# Altium PCB KNoT_Thing_Starter_Board.PcbDoc
Units mm, origin at the board's own origin, x right, y up, seen from the top; angles counter-clockwise.
Board outline 45.72 x 48.26 mm, 2 copper layers (Top Layer, Bottom Layer); 19 components, 30 nets, 133 pads, 10 vias.
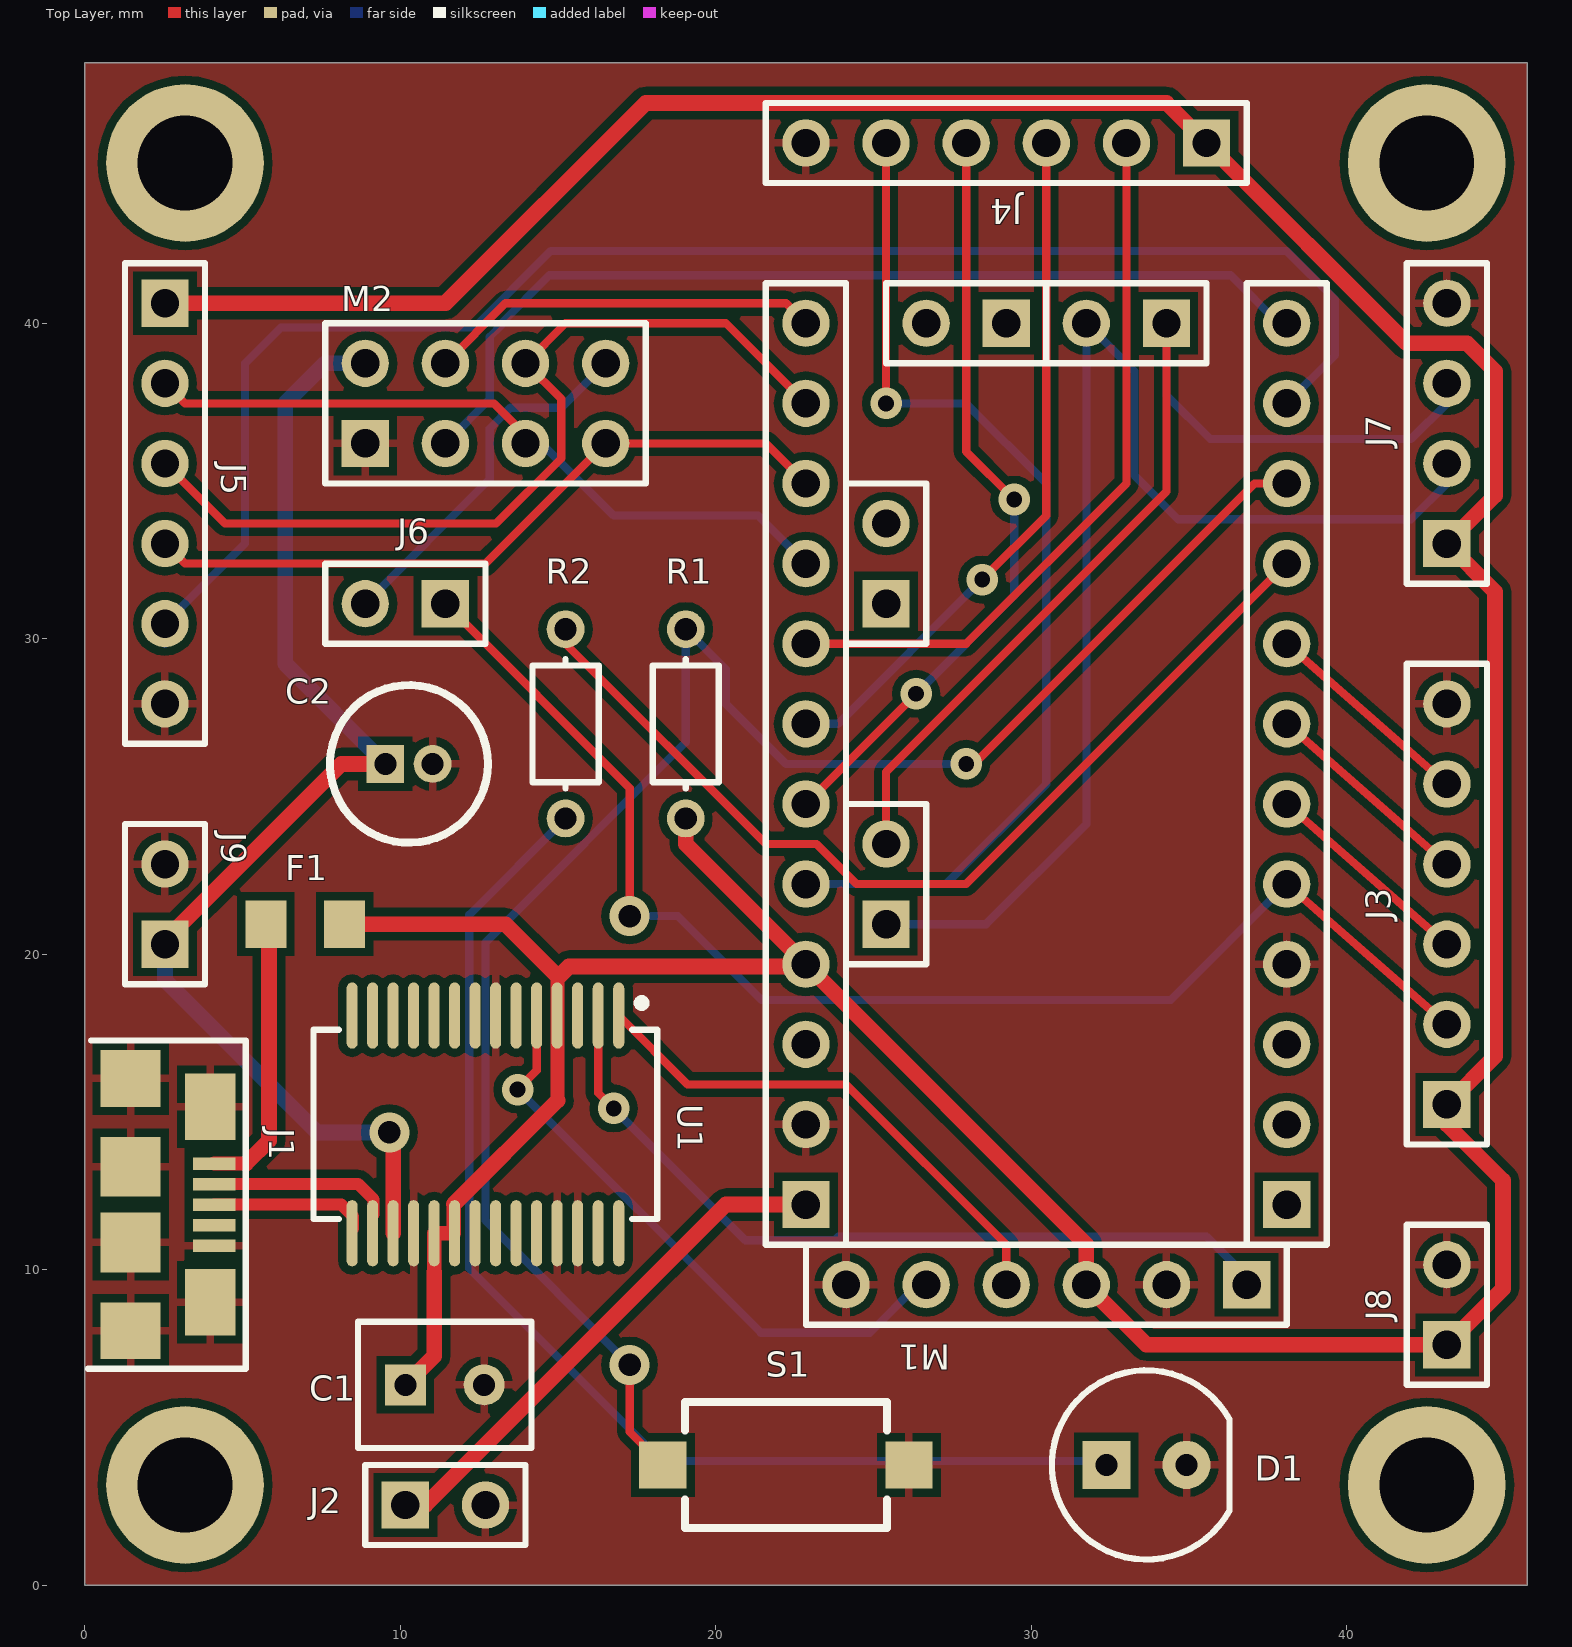
[diagram p0: Top Layer view]
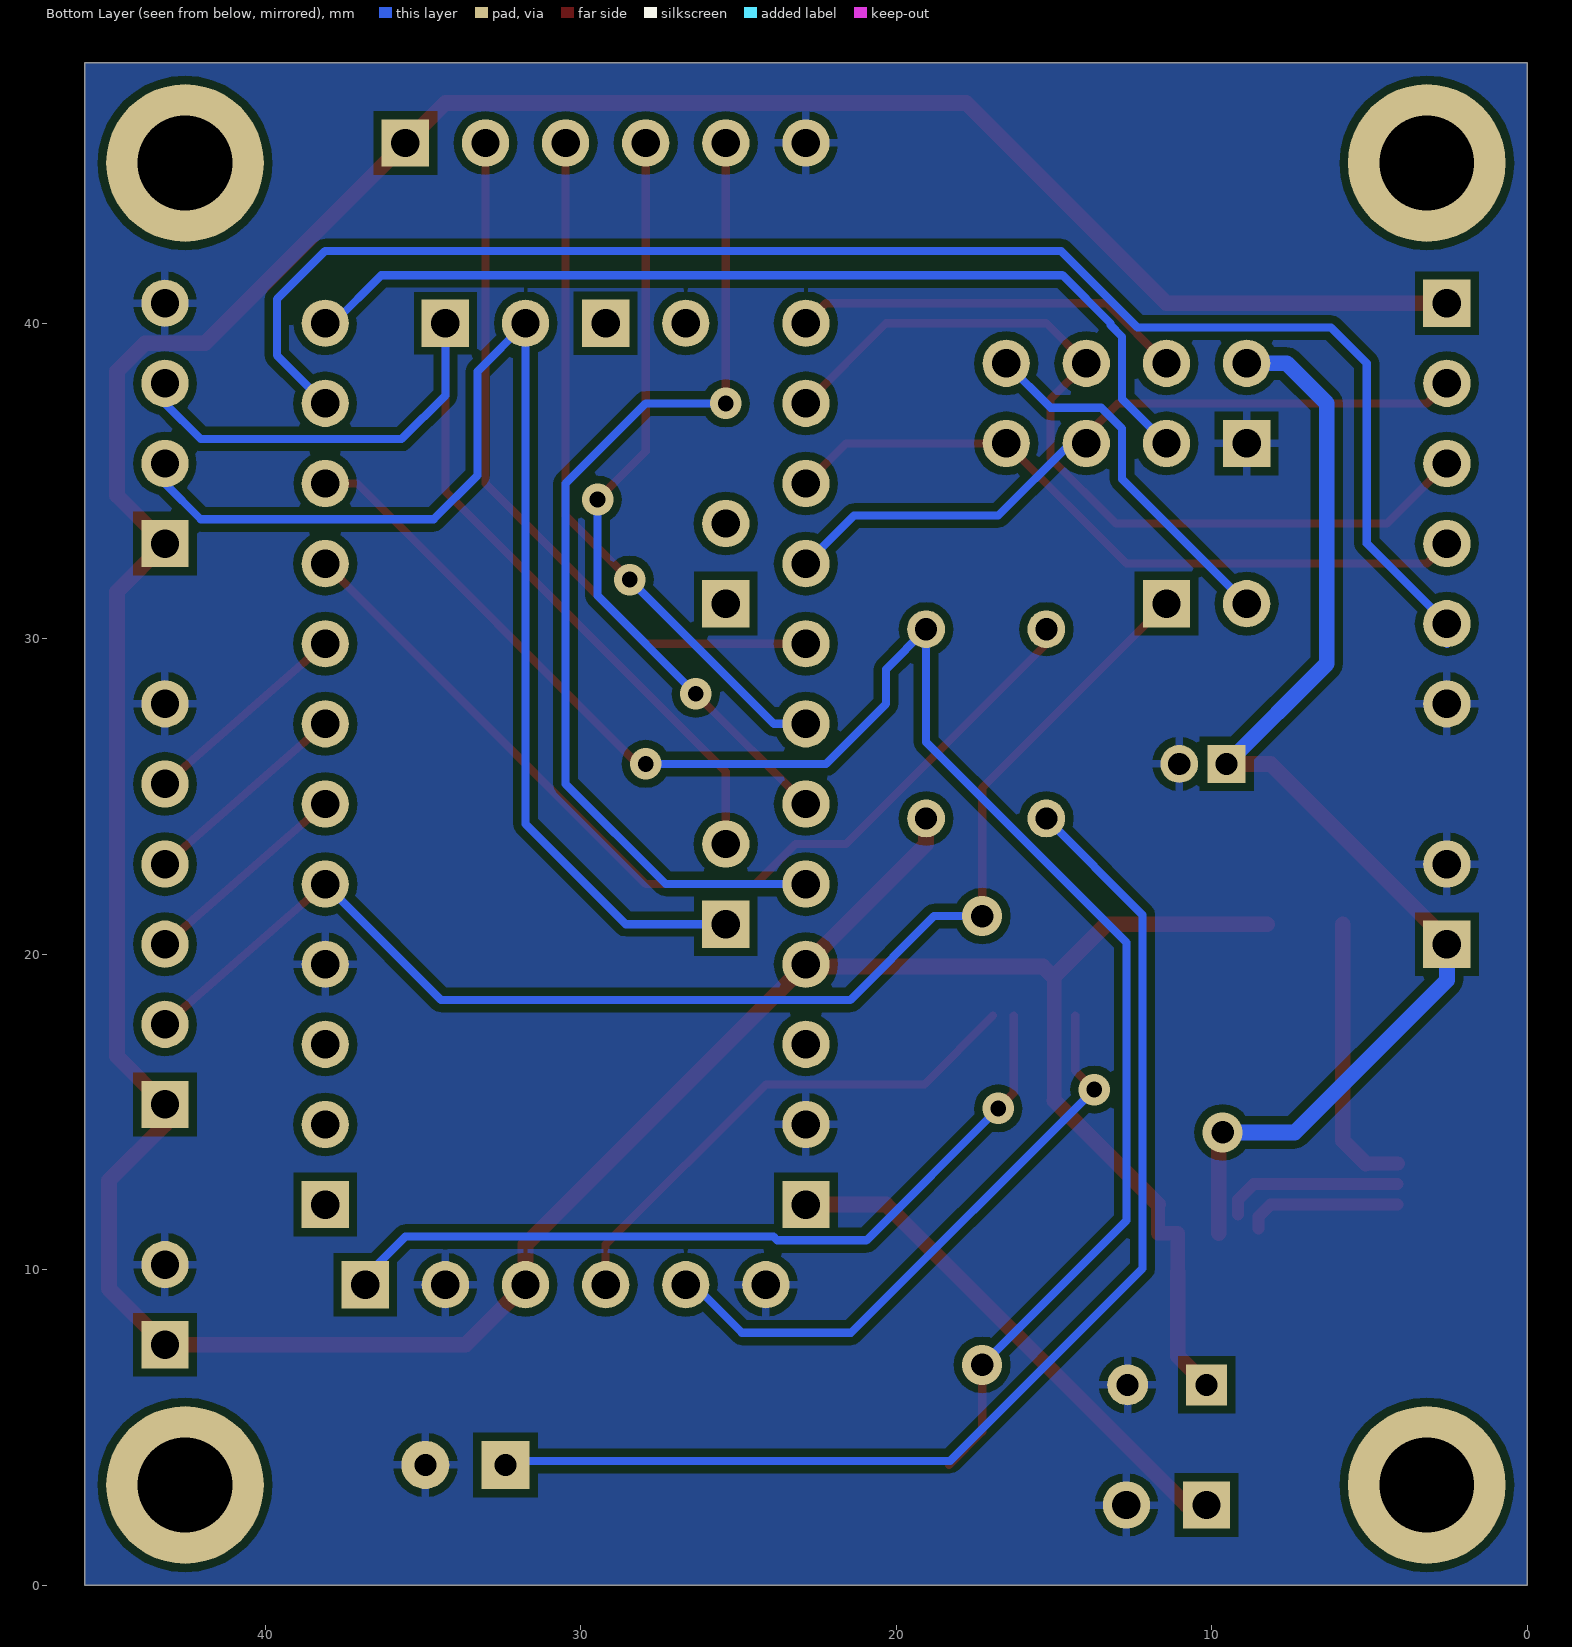
[diagram p1: Bottom Layer view, seen from below]

## Layer stack, top to bottom
Top Solder: solder mask 0.0102, Solder Resist, Dk 3.5
Top Layer: signal copper 0.0356
Dielectric 1: dielectric 0.32, FR-4, Dk 4.8
Bottom Layer: signal copper 0.0356
Bottom Solder: solder mask 0.0102, Solder Resist, Dk 3.5

## Board outline
0,0 45.72,0 45.72,48.26 0,48.26

## Design rules (kind name [scope] priority, off if disabled: settings)
Clearance [All] p1: gap=0.254
DiffPairsRouting [All] p1: maxlimit=0.254 minlimit=0.254 mostfreqgap=0.254 toplayer_minwidth=0.381 toplayer_maxwidth=0.381 toplayer_prefwidth=0.381 bottomlayer_minwidth=0.381 bottomlayer_maxwidth=0.381 bottomlayer_prefwidth=0.381 maxuncoupledlength=12.7
PolygonConnect [All] p1: connectstyle=Relief reliefconductorwidth=0.254 reliefentries=4 polygonreliefangle="90 Angle" airgapwidth=0.254
RoutingVias [All] p1: holewidth=0.711 width=1.27 viastyle="Through Hole" minholewidth=0.711 minwidth=1.27 maxholewidth=0.711 maxwidth=1.27
SolderMaskExpansion [All] p1: expansion=0.102
Width [All] p1: maxlimit=0.5 minlimit=0.254 preferedwidth=0.254
28 further rules are at their usual default settings.

## Classes and differential pairs
differential pair USB_FTDI: +USB_FTDI_P -USB_FTDI_N

## Components (designator, comment, footprint, x,y, rotation, side; value= is the part's Value field where it differs from the comment)
C1 "CAPC1608L" "CAP Radial 100uF" 10.16,6.35 r0 top
C2 "CAPC1608L" "CAP RADIAL MINIATURE" 9.525,26.035 r0 top
D1 "LED" LED 33.655,3.81 r0 top
F1 "0402L050SLKR" 0805L 6.985,20.955 r0 top
J1 "ZX62R-B-5P" "Micro USB b" 1.651,12.065 r270 top
J2 "Header 2H" HDR1X2 10.16,2.54 r0 top
J3 "Header 6" HDR1X6 43.18,15.24 r90 top
J4 "Header 6" HDR1X6 35.56,45.72 r180 top
J5 "Header 6" HDR1X6 2.54,40.64 r270 top
J6 "Header 2H" HDR1X2 11.43,31.115 r180 top
J7 "Header 4" HDR1X4 43.18,33.02 r90 top
J8 "Header 2H" HDR1X2 43.18,7.62 r90 top
J9 "Header 2H" HDR1X2 2.54,20.32 r90 top
M1 "Arduino Pro Mini 5V 16MHz" "Arduino Pro Mini" 36.83,9.525 r180 top
M2 "nRF24L01+ Module" "nRF24L01+ Module" 8.89,36.195 r0 top
R1 "Res1" AXIAL-3mm 19.05,27.305 r90 top
R2 "Res1" AXIAL-3mm 15.24,27.305 r270 top
S1 "SW-SPST" "SWITCH TS-1181" 22.225,3.81 r180 top
U1 "FT232RL-Reel" SSOP-28_N 12.7,14.605 r270 top

## Footprints (in the part's own frame and the unit in brackets; to place one, negate y for a bottom-side part, rotate by r counter-clockwise, add the part's x,y. Pads: shape width x height; smd on the part's side, far side on the other; paste and mask are expansions set on the pad)
0805L [mm] "0805 Hermes"
  rect 1.3x1.5 smd: 1(-1.25,0) 2(1.25,0)
  body extent -1.1,-0.75 1.1,0.75, height 1.24
"Arduino Pro Mini" [mm] "Arduino Pro Mini Module"
  rect 1.5x1.5 hole 0.9: 1(13.97,-2.54) 10(7.62,-30.48) 11(11.43,-21.59) 28(2.54,-30.48) 29(11.43,-11.43) 30(0,0) 34(-1.27,-2.54)
  round 1.5 hole 0.9: 2(5.08,0) 3(13.97,-10.16) 4(-1.27,-7.62) 5(13.97,-7.62) 6(13.97,-20.32) 7(13.97,-17.78) 8(13.97,-15.24) 9(13.97,-12.7) 10(11.43,-24.13) 11(10.16,-30.48) 12(2.54,0) 13(12.7,0) 14(-1.27,-10.16) 15(13.97,-5.08) 16(13.97,-22.86) 17(13.97,-25.4) 18(13.97,-27.94) 19(13.97,-30.48) 20(-1.27,-30.48) 21(-1.27,-27.94) 22(-1.27,-25.4) 23(-1.27,-22.86) 24(-1.27,-20.32) 25(-1.27,-17.78) 26(-1.27,-15.24) 27(-1.27,-12.7) 28(11.43,-13.97) 29(5.08,-30.48) 31(7.62,0) 32(10.16,0) 33(-1.27,-5.08)
  silkscreen extent -2.54,-31.75 15.24,1.27
AXIAL-3mm [mm] "Axial Device, Thru-Hole; 2 Leads; 3.3mm in Pin Spacing"
  round 1.2 hole 0.7: 1(-3,0) 2(3,0)
  silkscreen extent -2.05,-1.05 2.05,1.05, body extent -4.11,-1.2 4.11,1.2, height 2.4
"CAP Radial 100uF" [mm]
  rect 1.3x1.3 hole 0.7: 1(0,0)
  round 1.3 hole 0.7: 2(2.5,0)
  silkscreen extent -1.5,-2 4,2
"CAP RADIAL MINIATURE" [mm]
  rect 1.2x1.2 hole 0.7: 1(0,0)
  round 1.2 hole 0.7: 2(1.5,0)
  silkscreen extent -1.75,-2.5 3.25,2.5
HDR1X2 [mm] "Connector; Header; 2 Position"
  rect 1.5x1.5 hole 0.9: 1(0,0)
  round 1.5 hole 0.9: 2(2.54,0)
  silkscreen extent -1.27,-1.27 3.81,1.27
HDR1X4 [mm] "Connector; Header; 4 Position"
  rect 1.5x1.5 hole 0.9: 1(0,0)
  round 1.5 hole 0.9: 2(2.54,0) 3(5.08,0) 4(7.62,0)
  silkscreen extent -1.27,-1.27 8.89,1.27
HDR1X6 [mm] "Connector; Header; 6 Position"
  rect 1.5x1.5 hole 0.9: 1(0,0)
  round 1.5 hole 0.9: 2(2.54,0) 3(5.08,0) 4(7.62,0) 5(10.16,0) 6(12.7,0)
  silkscreen extent -1.27,-1.27 13.97,1.27
LED [mil]
  rect 60x60 hole 27.56: 1(-50,0)
  round 60 hole 27.56: 2(50,0)
  silkscreen extent -118,-118 104,118, body extent -118,-118 98,118, height 352
"Micro USB b" [mm]
  rect 0.4x1.35 smd: 1(-1.3,2.449) 2(-0.65,2.449) 3(0,2.449) 4(0.65,2.449) 5(1.3,2.449)
  rect 2.1x1.6 smd: 6(3.1,2.33) 11(-3.1,2.33)
  rect 1.8x1.9 smd: 7(4,-0.201) 10(-4,-0.201)
  rect 1.9x1.9 smd: 8(1.2,-0.2) 9(-1.2,-0.201)
  silkscreen extent -5.2,-1.55 5.2,3.45, body extent -4.04,-2.7 4.04,2.9, height 2.78
"nRF24L01+ Module" [mm] "nRF24L01+ Module"
  round 1.5 hole 0.9: 1(0,2.54) 2(7.62,2.54) 4(2.54,0) 5(7.62,0) 6(5.08,2.54) 7(5.08,0) 8(2.54,2.54)
  rect 1.5x1.5 hole 0.9: 3(0,0)
  silkscreen extent -1.27,-1.27 8.89,3.81
SSOP-28_N [mm] "SOP, 28-Leads, Body 10.2x5.3mm, Pitch 0.65mm, IPC Medium Density"
  oval 2.1x0.35 smd: 1(-3.45,4.225) 2(-3.45,3.575) 3(-3.45,2.925) 4(-3.45,2.275) 5(-3.45,1.625) 6(-3.45,0.975) 7(-3.45,0.325) 8(-3.45,-0.325) 9(-3.45,-0.975) 10(-3.45,-1.625) 11(-3.45,-2.275) 12(-3.45,-2.925) 13(-3.45,-3.575) 14(-3.45,-4.225) 15(3.45,-4.225) 16(3.45,-3.575) 17(3.45,-2.925) 18(3.45,-2.275) 19(3.45,-1.625) 20(3.45,-0.975) 21(3.45,-0.325) 22(3.45,0.325) 23(3.45,0.975) 24(3.45,1.625) 25(3.45,2.275) 26(3.45,2.925) 27(3.45,3.575) 28(3.45,4.225)
  silkscreen extent -3.97,-5.45 3,5.45, body extent -3.9,-5.1 3.9,5.1, height 1.9
"SWITCH TS-1181" [mm]
  rect 1.5x1.5 smd: 1(-3.9,0) 2(3.9,0)
  silkscreen extent -3.2,-2 3.2,2, body extent -4,-1.8 4,1.8, height 2.4

## Part data
C1 C2: "4.7µF 10V Ceramic Capacitor X5R 0603"
D1: "Typical RED, GREEN, YELLOW, AMBER GaAs LED"
F1: library part "Fuse 2", "PTC Resettable Fuse 6V 500mA Ih Surface Mount 0402 (1005 Metric), Concave"
J1: "USB Connector"
J2 J6 J8 J9: "Header, 2-Pin, Right Angle"
J3 J4 J5: "Header, 6-Pin"
J7: "Header, 4-Pin"
R1 R2: "Resistor"
S1: "Single-Pole, Single-Throw Switch"
U1: "USB UART Asynchronous Serial Data Transfer Chip, 28-pin SSOP, Tape and Reel"

## Free pads (board coordinates)
  round 5 hole 3: ""(3.175,3.175) ""(3.175,45.085) ""(42.545,3.175) ""(42.545,45.085)

## Via types
v1: diameter 1, hole 0.5, Top Layer to Bottom Layer, 7 vias
v2: diameter 1.27, hole 0.711, Top Layer to Bottom Layer, 3 vias

## Nets (pads, with @x,y where several pads share a name; then routed paths per layer and width w, separated by ;. In a path a pad name is that pad's centre, name@x,y a point inside that pad or via, vN(x,y) a via of type N, cw(c..) or ccw(c..) an arc to the next point about the centre after c; other vN are vias at no path point)
AN0: J4.2 M1.6 | length 22.4
  Top Layer w0.26: M1.6 27.94,29.845 33.02,34.925 J4.2@33.02,45.085
AN1: J4.3 M1.7 | length 21.5
  Top Layer w0.26: v1(28.448,31.877) 30.48,33.909 J4.3@30.48,45.085
  Bottom Layer w0.26: M1.7 23.876,27.305 v1(28.448,31.877)
AN2: J4.4 M1.8 | length 23.7
  Top Layer w0.26: M1.8 v1(26.353,28.258) ; J4.4@27.94,45.085 27.94,35.941 v1(29.464,34.417)
  Bottom Layer w0.26: v1(26.353,28.258) 29.464,31.369 v1(29.464,34.417)
AN3: J4.5 M1.9 | length 32.2
  Top Layer w0.26: v1(25.4,37.465) J4.5@25.4,45.085
  Bottom Layer w0.26: M1.9 27.305,22.225 30.48,25.4 30.48,34.925 27.94,37.465 v1(25.4,37.465)
GND: C1.2 C2.2 D1.2 J1.5 J1.6 J1.7 J1.8 J1.9 J1.10 J1.11 J2.2 J3.6 J4.6 J5.6 J7.4 J8.2 J9.2 M1.12 M1.13 M1.14 M1.15 M2.3 S1.1 U1.7 U1.18 U1.21 U1.25 U1.26
GPIO_PD2: J3.2 J6.1 M1.27 | length 42.5
  Top Layer w0.26: J6.1 17.272,25.273 v2(17.272,21.209) ; M1.27 J3.2
  Bottom Layer w0.26: v2(17.272,21.209) 18.796,21.209 21.454,18.551 34.426,18.551 M1.27
GPIO_PD3: J3.3 M1.26 | length 6.8
  Top Layer w0.26: M1.26 J3.3
GPIO_PD4: J3.4 M1.25 | length 6.8
  Top Layer w0.26: M1.25 J3.4
GPIO_PD5: J3.5 M1.24 | length 6.8
  Top Layer w0.26: M1.24 J3.5
I2C_SCL: J7.2 M1.29 | length 39.9
  Bottom Layer w0.26: M1.29@25.4,20.955 28.575,20.955 31.75,24.13 31.75,40.005 33.274,38.481 33.274,35.179 34.662,33.791 42.046,33.791 J7.2@43.18,34.925
I2C_SDA: J7.3 M1.28 | length 32.4
  Top Layer w0.26: M1.28@25.4,23.495 25.4,25.781 34.29,34.671 M1.28@34.29,40.005
  Bottom Layer w0.26: M1.28@34.29,40.005 34.29,37.719 35.678,36.331 42.046,36.331 J7.3@43.18,37.465
MCU_DTR: M1.30 U1.2 | length 25.8
  Top Layer w0.26: U1.2 16.275,15.602 v1(16.764,15.113)
  Bottom Layer w0.26: v1(16.764,15.113) 20.946,10.931 23.769,10.931 23.887,11.049 35.56,11.049 36.83,9.779 M1.30
MCU_RXD: M1.31 U1.1 | length 16.6
  Top Layer w0.26: U1.1 19.105,15.875 24.13,15.875 29.21,10.795 M1.31
MCU_TXD: M1.32 U1.5 | length 19.4
  Top Layer w0.26: v1(13.719,15.711) 14.325,16.317 U1.5
  Bottom Layer w0.26: v1(13.719,15.711) 21.429,8.001 24.892,8.001 26.416,9.525 M1.32
NetD1_1: D1.1 R2.2 | length 38.3
  Bottom Layer w0.26: R2.2 12.186,21.251 12.186,10.039 18.288,3.937 32.258,3.937 D1.1
NetJ6_2: J6.2 M2.2 | length 11.7
  Bottom Layer w0.26: J6.2 12.836,35.061 12.836,36.665 13.5,37.329 15.104,37.329 M2.2
NetM1_22: M1.22 R1.2 S1.2 | length 56.6
  Top Layer w0.26: v2(17.272,6.985) 17.272,4.863 S1.2 ; v1(27.94,26.035) 28.194,26.035 37.084,34.925 M1.22
  Bottom Layer w0.26: v2(17.272,6.985) 12.7,11.557 12.7,20.373 19.05,26.723 R1.2 20.32,29.035 20.32,27.94 22.225,26.035 v1(27.94,26.035)
RAW: J2.1 M1.1 | length 16.6
  Top Layer w0.5: J2.1 10.795,2.54 20.32,12.065 M1.1
RF_CE: M1.20 M2.4 | length 30.7
  Bottom Layer w0.26: M2.4 12.836,37.601 12.836,39.577 13.208,39.949 13.208,40.005 14.732,41.529 36.322,41.529 37.846,40.005 M1.20
SPI_EXT_SELECT: J5.5 M1.21 | length 50.5
  Bottom Layer w0.26: J5.5@2.54,29.845 J5.5 5.08,33.02 5.08,38.735 6.214,39.869 12.345,39.869 14.767,42.291 38.1,42.291 39.624,40.767 39.624,38.989 M1.21
SPI_MISO: J5.4 M1.17 M2.5 | length 22.7
  Top Layer w0.26: J5.4 3.175,32.385 12.7,32.385 M2.5 21.59,36.195 M1.17
SPI_MOSI: J5.3 M1.18 M2.6 | length 28.2
  Top Layer w0.26: J5.3 4.445,33.655 13.034,33.655 15.104,35.725 15.104,37.601 M2.6 15.24,40.005 20.32,40.005 M1.18
SPI_SCK: J5.2 M1.16 M2.7 | length 22.8
  Top Layer w0.26: J5.2 3.175,37.465 12.972,37.465 13.97,36.467 M2.7
  Bottom Layer w0.26: M2.7 14.478,36.195 16.764,33.909 21.336,33.909 M1.16
SPI_SELECT: M1.19 M2.8 | length 12.5
  Top Layer w0.26: M2.8 13.335,40.64 22.225,40.64 M1.19
STATUS_LED: M1.23 R2.1 | length 30.7
  Top Layer w0.26: R2.1 15.24,29.845 21.59,23.495 23.194,23.495 24.464,22.225 27.94,22.225 M1.23
USB_FTDI_N: J1.2 U1.16 | length 5.7
  Top Layer w0.381: J1.2 8.666,12.715 9.156,12.226 U1.16@9.156,11.752
USB_FTDI_P: J1.3 U1.15 | length 4.9
  Top Layer w0.381: J1.3 8.128,12.065 8.506,11.688 U1.15@8.506,11.303
VBUS: F1.1 J1.1 | length 8.9
  Top Layer w0.45: J1.1 5.11,13.365
  Top Layer w0.5: 5.11,13.365 5.842,14.097 F1.1@5.842,20.955
VCC_3V3: C2.1 J9.1 M2.1 U1.17 | length 38.1
  Top Layer w0.5: J9.1@2.476,20.383 8.128,26.035 C2.1 ; v2(9.652,14.351) 9.775,14.228 U1.17
  Bottom Layer w0.5: J9.1@2.54,19.685 2.54,19.177 7.366,14.351 v2(9.652,14.351) ; M2.1 7.62,38.735 6.35,37.465 6.35,29.21 C2.1
VCC_5V: C1.1 F1.2 J3.1 J4.1 J5.1 J7.1 J8.1 M1.2 M1.3 R1.1 U1.4 U1.19 U1.20 | length 145.6
  Top Layer w0.45: 11.075,9.932 U1.19 ; U1.19@11.104,11.155 11.696,11.155 U1.20@11.696,12.077 ; 14.986,15.367 14.986,19.304
  Top Layer w0.5: J5.1 11.43,40.64 17.78,46.99 34.29,46.99 J4.1 41.91,39.37 43.815,39.37 44.704,38.481 44.704,34.544 J7.1 44.704,31.496 44.704,16.764 J3.1 43.18,14.605 44.958,12.827 44.958,9.398 J8.1 33.655,7.62 M1.2 31.75,10.795 M1.3 ; F1.2 13.335,20.955 14.986,19.304 15.039,19.304 15.344,19.609 22.784,19.609 M1.3 ; C1.1 11.075,7.265 11.075,9.932 ; U1.20@11.696,12.077 14.986,15.367 ; R1.1 19.05,23.495 M1.3
pads on no net: J1.4 M1.4 M1.5 M1.10 M1.11 M1.33 M1.34 U1.3 U1.6 U1.8 U1.9 U1.10 U1.11 U1.12 U1.13 U1.14 U1.22 U1.23 U1.24 U1.27 U1.28

## Polygon pours and split planes (outlines as drawn)
GND on Bottom Layer "GND plane" (solid, pour order 8): 0,0 0,48.26 45.72,48.26 45.72,0
GND on Top Layer "GND plane" (solid, pour order 6): 0,0 0,48.26 45.72,48.26 45.72,0

## Silkscreen, mask and mechanical layers (free items; w line width, h text height)
Mechanical 1:
  the board outline again, w0.05